# EAGLE board Powerful Luulia (3) (EAGLE 7.6.0)

Size 73.58 x 418.99 mm. Coordinates in mm from the lower left corner, seen from the top.
Outline: 0,0 56.82,0 56.82,53.33 0,53.33 0,0
Copper layers (1*16): Top 0.035mm / dielectric 1.5mm / Bottom 0.035mm
Design rules "default": minimum track width 10mil, minimum drill 24mil, track to track 8mil, track to pad 8mil, pad to pad 8mil, via to via 8mil, smd to smd 8mil, copper to edge 40mil, drill to drill 8mil, minimum pad ring 10mil, minimum via ring 8mil, stop-mask expansion 4mil, vias tented up to drill 0mil, thermal gap 10mil

## Footprints (pad centres in the part's own frame; a part is rotated, then mirrored left to right if it is on the bottom)
LED5MM = drill 0.813 octagon: A -1.27,0; K 1.27,0
0207/10 = drill 0.813 octagon: 1 -5.08,0; 2 5.08,0
TL1105 = drill 1 pad 1.676: 1 -2.25,3.25; 2 2.25,3.25; 3 -2.25,-3.25; 4 2.25,-3.25
ARDUINO_UNO = drill 1.016 pad 1.88: 0 63.5,50.8; 1 60.96,50.8; 2 58.42,50.8; 3 55.88,50.8; 3.3V 35.56,2.54; 4 53.34,50.8; 5 50.8,50.8; 5V 38.1,2.54; 6 48.26,50.8; 7 45.72,50.8; 8 41.656,50.8; 9 39.116,50.8; 10 36.576,50.8; 11 34.036,50.8; 12 31.496,50.8; 13 28.956,50.8; A0 50.8,2.54; A1 53.34,2.54; A2 55.88,2.54; A3 58.42,2.54; A4 60.96,2.54; A5 63.5,2.54; AREF 23.876,50.8; GND 26.416,50.8; GND. 43.18,2.54; GND.. 40.64,2.54; I/OREF 30.48,2.54; N/C 27.94,2.54; RESET 33.02,2.54; SCL 18.796,50.8; SDA 21.336,50.8; VIN 45.72,2.54 | hole 3.2: 66.04,7.62; 66.04,35.56; 15.24,50.8; 13.97,2.54

## Placement (x,y rotation side)
D1  [LED5MM]  5,22.78 0 top
D2  [LED5MM]  5,35.48 0 top
D3  [LED5MM]  5,48.18 0 top
D4  [LED5MM]  5,60.88 0 top
D5  [LED5MM]  5,73.58 0 top
D6  [LED5MM]  5,200.58 0 top
D7  [LED5MM]  5,251.38 0 top
D8  [LED5MM]  5,264.08 0 top
D9  [LED5MM]  5,302.18 0 top
D10  [LED5MM]  5,314.88 0 top
D11  [LED5MM]  5,378.38 0 top
D12  [LED5MM]  5,391.08 0 top
D13  [LED5MM]  5,403.78 0 top
R1  0.1k‎Ω  [0207/10]  5,86.28 0 top
R2  0.1k‎Ω  [0207/10]  5,98.98 0 top
R3  0.1k‎Ω  [0207/10]  5,111.68 0 top
R4  0.1k‎Ω  [0207/10]  5,213.28 0 top
R5  0.1k‎Ω  [0207/10]  5,124.38 0 top
R6  1k‎Ω  [0207/10]  5,225.98 0 top
R7  0.1k‎Ω  [0207/10]  5,137.08 0 top
R8  0.1k‎Ω  [0207/10]  5,238.68 0 top
R9  0.1k‎Ω  [0207/10]  5,276.78 0 top
R10  0.1k‎Ω  [0207/10]  5,289.48 0 top
R11  0.1k‎Ω  [0207/10]  5,327.58 0 top
R13  0.1k‎Ω  [0207/10]  5,340.28 0 top
R14  0.1k‎Ω  [0207/10]  5,352.98 0 top
R15  0.1k‎Ω  [0207/10]  5,416.48 0 top
R16  0.1k‎Ω  [0207/10]  5,429.18 0 top  (outside the outline)
R17  0.1k‎Ω  [0207/10]  5,441.88 0 top  (outside the outline)
S4  [TL1105]  5,149.78 0 top
S5  [TL1105]  5,162.48 0 top
S6  [TL1105]  5,187.88 0 top
U1  [ARDUINO_UNO]  5,10.08 0 top
U2  [ARDUINO_UNO]  5,175.18 0 top
U3  [ARDUINO_UNO]  5,365.68 0 top

## Library data of the parts
D1-D13 R1-R11 R13-R17 S4-S6 U1-U3 = AUTODESK_CIRCUITS_BREADBOARD

## Nets
N$1: D5.A U1.4
N$2: D4.A U1.3
N$3: D3.A U1.2
N$4: D2.A U1.1
N$5: D1.A U1.0
N$6: D2.K R5.2
N$7: D3.K R2.2
N$8: D1.K R7.2
N$9: D4.K R1.2
N$10: D5.K R3.2
N$11: S4.2 U1.8
N$12: S4.1
N$13: S5.2 U1.7
N$14: S5.1
N$15: R4.2 S4.4
N$16: R6.2 S5.4
N$17: S4.3 S5.3 U1.5V
N$18: R14.2 S6.4
N$19: S6.1
N$20: S6.3 U2.5V
N$21: S6.2 U2.7
N$22: R1.1 R2.1 R3.1 R4.1 R5.1 R6.1 R7.1 U1.GND
N$23: D6.K R8.2
N$24: R8.1 R9.1 R10.1 R11.1 R13.1 R14.1 U2.GND
N$25: D7.K R9.2
N$26: D7.A U2.1
N$27: D8.K R10.2
N$28: D8.A U2.2
N$29: D6.A U2.0
N$30: D10.K R13.2
N$31: D10.A U2.4
N$32: D9.K R11.2
N$33: D9.A U2.3
N$34: D11.A U3.0
N$35: D12.A U3.1
N$36: R15.1 R16.1 R17.1 U3.GND
N$37: D13.A U3.2
N$38: D11.K R15.2
N$39: D12.K R16.2
N$40: D13.K R17.2

## Tracks (layer width: path | path; a pad name or v marks a point on that pad's centre or on a via)
N$1  (1 unrouted)
N$2  (1 unrouted)
N$3  (1 unrouted)
N$4  (1 unrouted)
N$5  (1 unrouted)
N$6  (1 unrouted)
N$7  (1 unrouted)
N$8  (1 unrouted)
N$9  (1 unrouted)
N$10  (1 unrouted)
N$11  (1 unrouted)
N$13  (1 unrouted)
N$15  (1 unrouted)
N$16  (1 unrouted)
N$17  (2 unrouted)
N$18  (1 unrouted)
N$20  (1 unrouted)
N$21  (1 unrouted)
N$22  (7 unrouted)
N$23  (1 unrouted)
N$24  (6 unrouted)
N$25  (1 unrouted)
N$26  (1 unrouted)
N$27  (1 unrouted)
N$28  (1 unrouted)
N$29  (1 unrouted)
N$30  (1 unrouted)
N$31  (1 unrouted)
N$32  (1 unrouted)
N$33  (1 unrouted)
N$34  (1 unrouted)
N$35  (1 unrouted)
N$36  (3 unrouted)
N$37  (1 unrouted)
N$38  (1 unrouted)
N$39  (1 unrouted)
N$40  (1 unrouted)